# Altium PCB Pmaster-A9112-HOST_1.PcbDoc
Units mil, origin at the board's own origin, x right, y up, seen from the top; angles counter-clockwise.
Board outline 2549 x 1381 mil, 2 copper layers (Top Layer, Bottom Layer); 74 components, 57 nets, 217 pads, 353 vias.
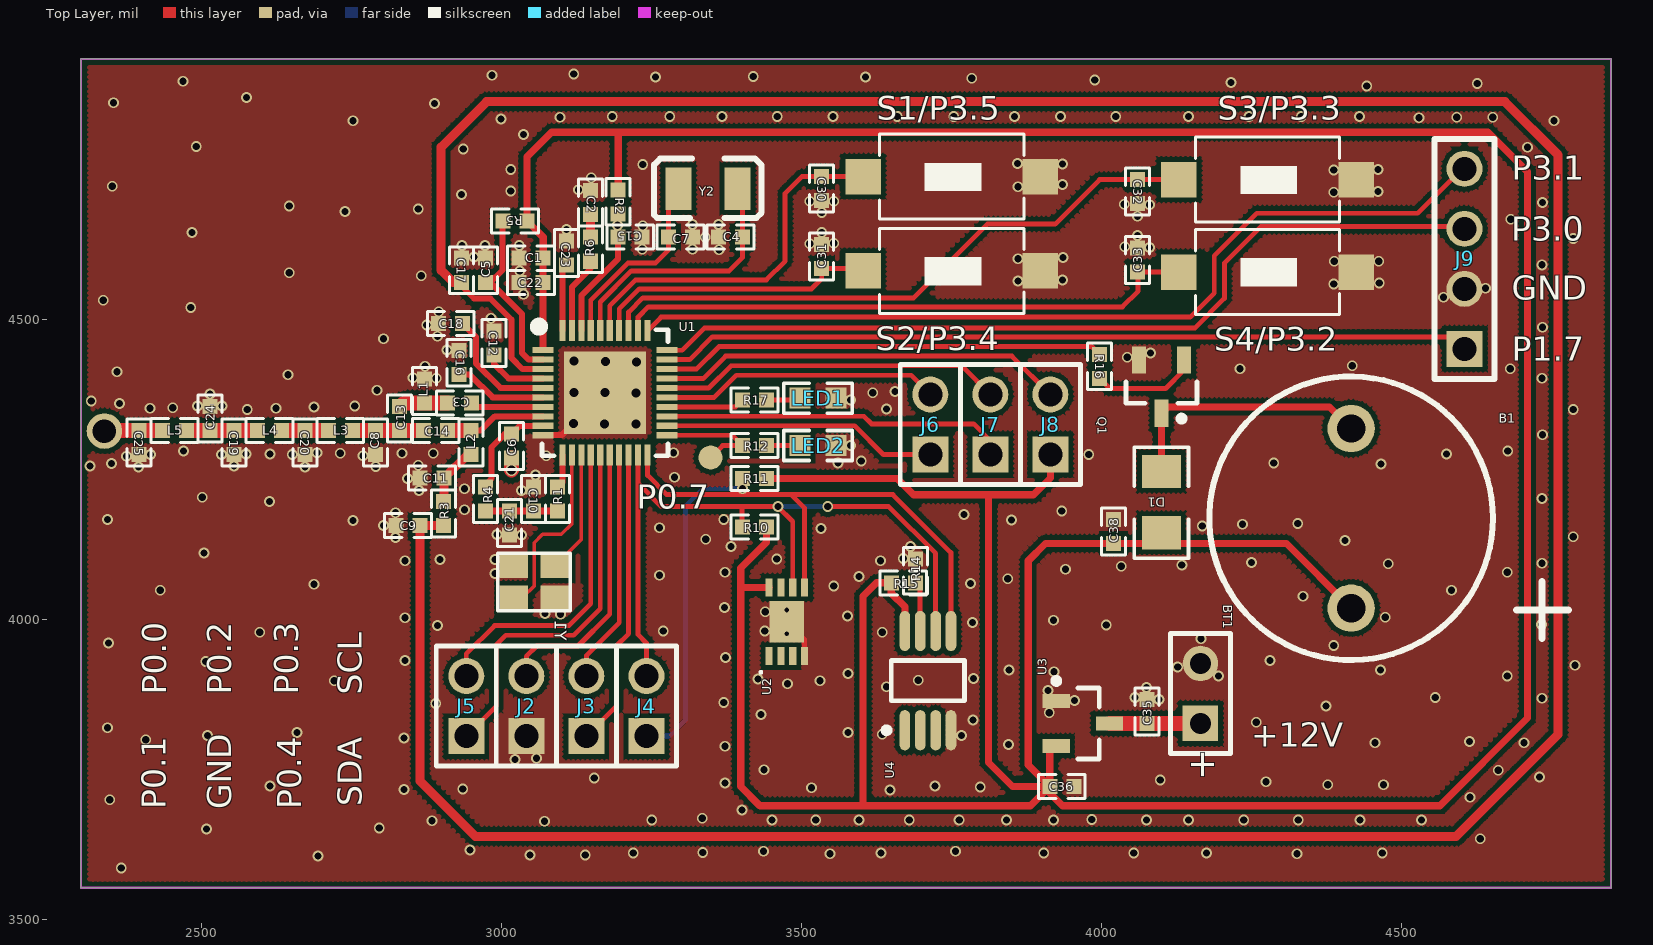
[diagram p0: Top Layer view]
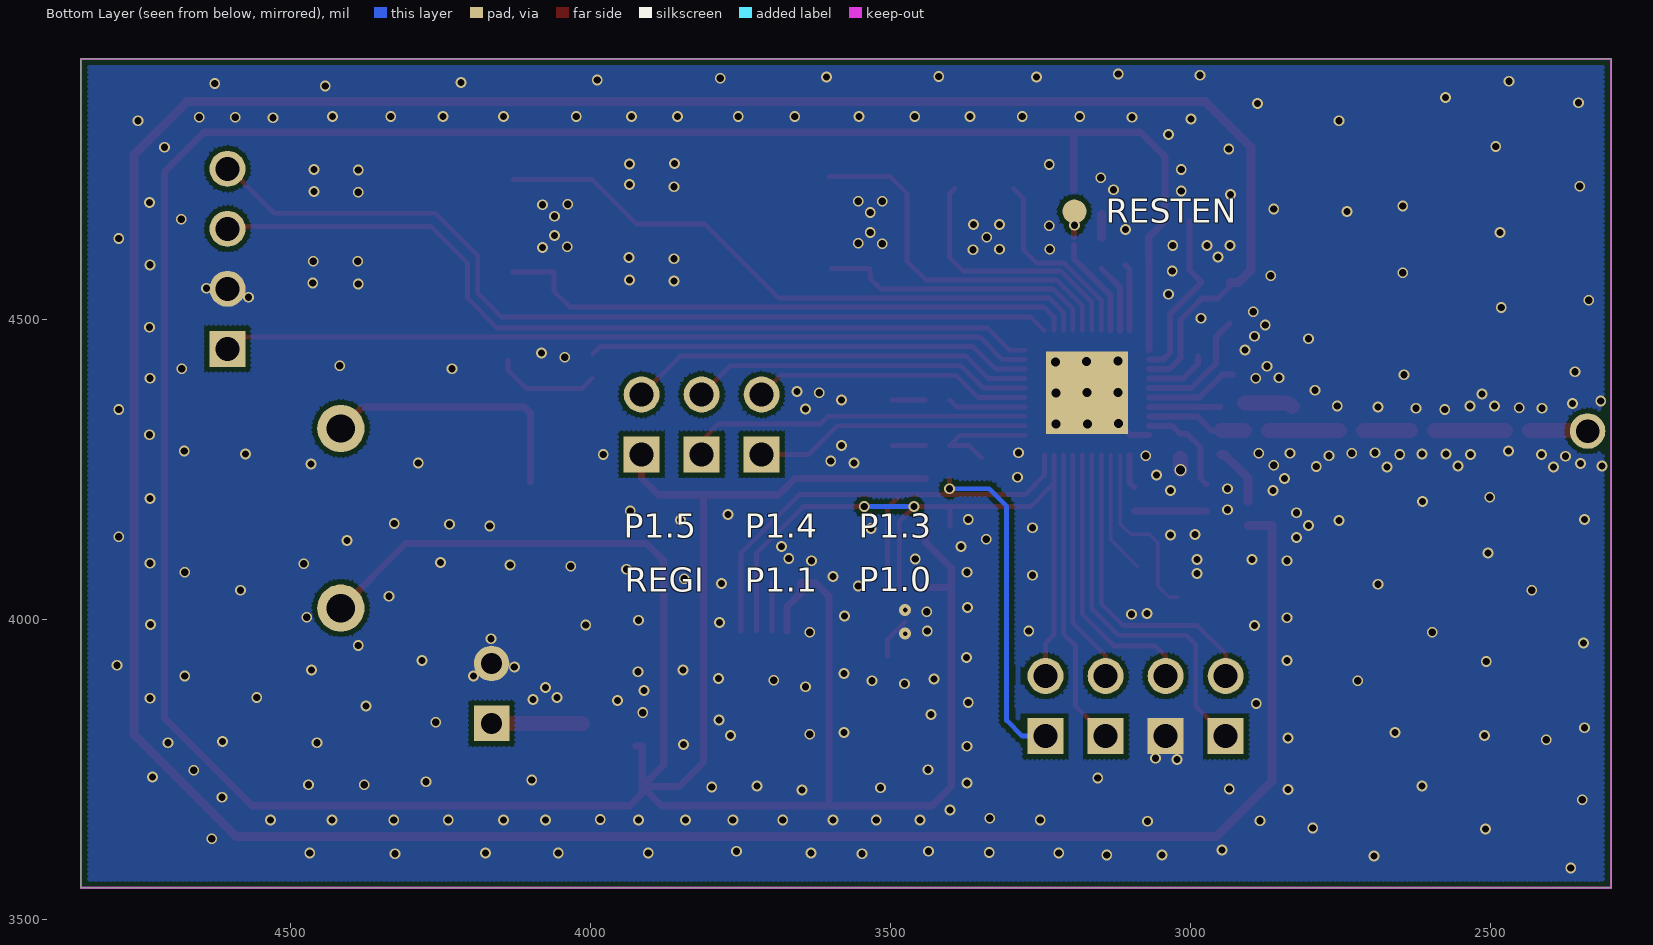
[diagram p1: Bottom Layer view, seen from below]

## Layer stack, top to bottom
Top Solder: solder mask 0.4, Solder Resist, Dk 3.5
Top Layer: signal copper 1.4
Dielectric 1: dielectric 12.6, FR-4, Dk 4.8
Bottom Layer: signal copper 1.4
Bottom Solder: solder mask 0.4, Solder Resist, Dk 3.5

## Board outline
2300,3553 2300,4934 4849,4934 4849,3553

## Design rules (kind name [scope] priority, off if disabled: settings)
Clearance [All] p1: gap=8
PlaneConnect [All] p1: planeconnectstyle=Direct reliefexpansion=20 reliefentries=4 reliefconductorwidth=10 reliefairgap=10
PolygonConnect [All] p1: connectstyle=Direct reliefconductorwidth=10 reliefentries=4 polygonreliefangle="90 Angle" airgapwidth=10
RoutingVias [All] p1: holewidth=28 width=50 viastyle="Through Hole" minholewidth=28 minwidth=50 maxholewidth=28 maxwidth=50
SolderMaskExpansion [All] p1: expansion=4
Width [All] p1: maxlimit=100 minlimit=5 preferedwidth=10
29 further rules are at their usual default settings.

## Classes and differential pairs
component class Pmaster-A9112-HOST_0: B1 BT1 C1 C2 C3 C4 C5 C6 C7 C8 C9 C10 C11 C12 C13 C14 C15 C16 C17 C18 C19 C20 C21 C22 C23 C30 C31 C32 C33 C35 C36 C38 D1 L1 L2 L3 L4 Q1 R1 R2 R3 R4 R5 R6 R10 R11 R12 R14 R15 R16 R17 SW1 SW2 SW3 SW4 TP1 U1 U3 U4 Y2

## Components (designator, comment, footprint, x,y, rotation, side; value= is the part's Value field where it differs from the comment)
B1 "BUZZER/TMB12A03" BUZEER 4416,4405 r180 top
BT1 "Battery" BAT-2 4165,3877 r90 top
C1 "10uF" A0402 3070,4602 r180 top
C2 "2.2uF" A0402 3149,4715 r270 top
C3 "100pF" A0402 2951,4361 r180 top
C4 "22pF" A0402 3402,4637 r180 top
C5 "2.2uF" A0402 2974,4562 r90 top
C6 "1uF" A0402 3017,4309 r270 top
C7 "22pF" A0402 3279,4637 r0 top
C8 "8.2pF" A0402 2791,4275 r90 top
C9 "2.2uF" A0402 2865,4157 r180 top
C10 "1nF" A0402 3054,4221 r270 top
C11 "NC" A0402 2865,4236 r0 top
C12 "1nF" A0402 2988,4441 r90 top
C13 "2.7pF" A0402 2831,4355 r270 top
C14 "27pF" A0402 2911,4315 r180 top
C15 "22nF" A0402 3195,4637 r0 top
C16 "0.1uF" A0402 2930,4448 r270 top
C17 "2.2uF" A0402 2934,4562 r90 top
C18 "470pF" A0402 2896,4493 r0 top
C19 "8.2pF" A0402 2555,4315 r270 top
C20 "15pF" A0402 2673,4315 r270 top
C21 "1uF" A0402 3014,4141 r90 top
C22 "2.2uF" A0402 3030,4562 r0 top
C23 "2.2uF" A0402 3109,4631 r270 top
C24 "NC" A0402 2515,4315 r90 top (schematic designator C19)
C25 "NC" A0402 2397,4315 r270 top (schematic designator C19)
C30 "0.1uF" A0402 3534,4698 r90 top
C31 "0.1uF" A0402 3534,4625 r270 top
C32 "0.1uF" A0402 4060,4693 r90 top
C33 "0.1uF" A0402 4060,4619 r270 top
C35 "2.2uF" A0402 4076,3867 r270 top
C36 "2.2uF" A0402 3914,3722 r0 top
C38 "0.1uF" A0402 4020,4167 r270 top
D1 "续流二极管/1N4148" 0805 4105,4247 r270 top
J2 "Comment" HDR2_2.54 3042,3806 r90 top
J3 "Comment" HDR2_2.54 3142,3806 r90 top
J4 "Comment" HDR2_2.54 3242,3806 r90 top
J5 "Comment" HDR2_2.54 2942,3806 r90 top
J6 "Comment" HDR2_2.54 3715,4275 r90 top
J7 "Comment" HDR2_2.54 3815,4275 r90 top
J8 "Comment" HDR2_2.54 3915,4275 r90 top
J9 "Comment" HDR4_2.54 4605,4451 r90 top
L1 "39nH" A0402 2872,4361 r90 top
L2 "33nH" A0402 2950,4275 r90 top
L3 "22nH" A0402 2712,4315 r0 top
L4 "22nH" A0402 2594,4315 r0 top
L5 "0" A0402 2436,4315 r0 top (schematic designator L4)
LED1 "GREEN" A0603 3498,4369 r0 top
LED2 "RED" A0603 3498,4290 r0 top
Q1 "8050_NPN" SOT23_N 4100,4388 r270 top
R1 "0" A0402 3094,4221 r270 top
R2 "100K" A0402 3195,4716 r270 top
R3 "0" A0402 2904,4157 r90 top
R4 "0" A0402 2974,4181 r90 top
R5 "0" A0402 3043,4664 r180 top
R6 "50" A0402 3149,4597 r90 top
R10 "4.7k" A0402 3442,4154.32 r180 top
R11 "4.7k" A0402 3402,4235 r0 top
R12 "330" A0402 3402,4290 r0 top
R14 "0" A0402 3690,4061.32 r90 top
R15 "NC" A0402 3650,4061.32 r0 top
R16 "1k" A0402 3997,4442 r270 top
R17 "330" A0402 3402,4366 r0 top (schematic designator R13)
S1/P3.5 "SW-PB" SW-SMD 3603,4738 r90 top
S2/P3.4 "SW-PB" SW-SMD 3603,4581 r90 top
S3/P3.3 "SW-PB" SW-SMD 4129,4733 r90 top
S4/P3.2 "SW-PB" SW-SMD 4129,4579 r90 top
U1 "A9112F4" QFN40_5*5 3173,4378 r0 top
U2 "Comment" DFN-MC8 3476,3996.32 r90 top
U3 "LP3995-33B3F" SOT-23_N 3969,3827 r0 top
U4 "EEPROM_24AA16" MSOP-MS8_N 3711,3898.32 r90 top
Y1 "12.8MHz/CL=20pF" XTAL_3.2*2.5 3055,4063 r270 top
Y2 "32.768KHz" XTAL_3215 3315,4679 r0 top

## Footprints (in the part's own frame and the unit in brackets; to place one, negate y for a bottom-side part, rotate by r counter-clockwise, add the part's x,y. Pads: shape width x height; smd on the part's side, far side on the other; paste and mask are expansions set on the pad)
0805 [mm]
  rect 1.4x1.65 smd: 1(0,-0.127) 2(2.6,-0.127)
  silkscreen extent -1.02,-1.27 3.68,1.02
A0402 [mil]
  rect 25x25 smd: 1(0,0) 2(40,0)
  silkscreen extent -19,-20 59,20, body extent -5,-15 45,15, height 39
A0603 [mil]
  rect 35x35 smd: 1(0,0) 2(60,0)
  silkscreen extent -27,-25 87,25
BAT-2 [mm] "Battery; 2 Leads"
  rect 1.5x1.5 hole 0.9: 1(-1.27,0)
  round 1.5 hole 0.9: 2(1.27,0)
  silkscreen extent -2.54,-1.27 2.54,1.27
BUZEER [mm] "TMB12A03"
  round 2 hole 1.2: 1(0,9.8) 2(0,2.2)
  silkscreen extent -6,0 6,12
DFN-MC8 [mm] "SON, 8-Leads, Body 2x3mm, Pitch 0.5mm, Microchip Recommended"
  rect 1.75x1.45 smd: 0(0,0)
  rect 0.75x0.3 smd: 1(-1.45,0.75) 2(-1.45,0.25) 3(-1.45,-0.25) 4(-1.45,-0.75) 5(1.45,-0.75) 6(1.45,-0.25) 7(1.45,0.25) 8(1.45,0.75)
  silkscreen extent -2.18,1.05 -2.09,1.15, body extent -1.55,-1.05 1.55,1.05, height 1
HDR2_2.54 [mil]
  rect 60x60 hole 40: 1(0,0)
  round 60 hole 40: 2(100,0)
  silkscreen extent -50,-50 150,50
HDR4_2.54 [mil]
  rect 60x60 hole 40: 1(0,0)
  round 60 hole 40: 2(100,0) 3(200,0) 4(300,0)
  silkscreen extent -50,-50 350,50
MSOP-MS8_N [mm] "TSOP, 8-Leads, Body 3x3mm, Pitch 0.65mm, IPC Medium Density"
  oval 1.7x0.45 smd: 1(-2.1,0.975) 2(-2.1,0.325) 3(-2.1,-0.325) 4(-2.1,-0.975) 5(2.1,-0.975) 6(2.1,-0.325) 7(2.1,0.325) 8(2.1,0.975)
  silkscreen extent -2.22,-1.55 0.85,1.87, body extent -1.6,-1.6 1.6,1.6, height 1.1
QFN40_5*5 [mil]
  rect 35x10.24 smd: 1(-103.43,70.87) 2(-103.43,55.12) 3(-103.43,39.37) 4(-103.43,23.62) 5(-103.43,7.87) 6(-103.43,-7.87) 7(-103.43,-23.62) 8(-103.43,-39.37) 9(-103.43,-55.12) 10(-103.43,-70.87) 21(103.43,-70.87) 22(103.43,-55.12) 23(103.43,-39.37) 24(103.43,-23.62) 25(103.43,-7.87) 26(103.43,7.87) 27(103.43,23.62) 28(103.43,39.37) 29(103.43,55.12) 30(103.43,70.87)
  rect 10.24x35 smd: 11(-70.87,-103.43) 12(-55.12,-103.43) 13(-39.37,-103.43) 14(-23.62,-103.43) 15(-7.87,-103.43) 16(7.87,-103.43) 17(23.62,-103.43) 18(39.37,-103.43) 19(55.12,-103.43) 20(70.87,-103.43) 31(70.87,103.43) 32(55.12,103.43) 33(39.37,103.43) 34(23.62,103.43) 35(7.87,103.43) 36(-7.87,103.43) 37(-23.62,103.43) 38(-39.37,103.43) 39(-55.12,103.43) 40(-70.87,103.43)
  round 15 hole 15: ""(-52.5,-51.5) ""(-52,0.5) ""(-51.5,52.5) ""(-0.5,-52) ""(0.5,52) ""(51.5,-52.5) ""(52,-0.5) ""(52.5,51.5)
  rect 136.79x136.79 hole 15: ""(0,0)
  silkscreen extent -115,-105 105,115
SOT23_N [mm] "SOT23, 3-Leads, Body 2.9x1.3mm, Pitch 0.95mm, Lead Span 2.3mm - Reverse Pinning, IPC Medium Density"
  rect 1.15x0.6 smd: 1(1.125,0) 2(-1.125,-0.95) 3(-1.125,0.95)
  silkscreen extent -0.2,-1.5 1.47,1.5, body extent -0.7,-1.5 0.7,1.5, height 1.1
SOT-23_N [mm] "SOT23, 3-Leads, Body 2.9x1.3mm, Pitch 0.95mm, Lead Span 2.5mm, IPC Medium Density"
  rect 1.15x0.6 smd: 1(-1.125,0.95) 2(-1.125,-0.95) 3(1.125,0)
  silkscreen extent -1.25,-1.5 0.7,1.92, body extent -0.7,-1.5 0.7,1.5, height 1.1
SW-SMD [mm]
  rect 1.5x1.5 smd: 1(0,0) 2(0,-7.5)
  silkscreen extent -1.8,-6.8 1.8,-0.7
XTAL_3.2*2.5 [mm]
  rect 1x1.2 smd: 1(-0.66,0.87) 2(-0.66,-0.87) 3(0.66,-0.87) 4(0.65,0.87)
  silkscreen extent -1.21,-1.55 1.22,1.53
XTAL_3215 [mm] "32.768kHz"
  rect 1.1x1.8 smd: 0(-0.5,0.991) 1(2,0.991)
  silkscreen extent -1.52,-0.25 3.02,2.26

## Part data
B1: library part BUZZER
BT1: "Multicell Battery"
C1 C2 C3 C5 C6 C8 C10 C12 C13 C14 C16 C18 C21 C22 C23 C30 C31 C32 C33 C35: library part CAP
C4 C7: library part C/0402, "Chip C"
C9 C11 C17 C19 C20 C24 C25 C36 C38: library part C/0603, "Chip C"
C15: library part C/1206, "Chip C"
D1: library part Diode, "Default Diode"
L1 L2: library part L/0402, "Chip L"
L3 L4 L5 R6: library part L/0603
Q1: library part NPN, "NPN Bipolar Transistor"
R1 R5 R10 R11 R12 R14 R15 R16 R17: library part RES1
R2: library part R/0402, "Chip R"
R3 R4: library part R/0603, "Chip  R"
U3: library part REG\G903\3.3V\SOT-223, "GMT 3.3V REGULTOR"
Y2: library part CRYSTAL, "Crystal"

## Free pads (board coordinates)
  round 59.06 hole 39.37: 0(2339,4314)
  round 40 smd far side: 0(3194,4680)
  round 40 smd: 1(3349,4270)

## Via types
v1: diameter 18, hole 12, Top Layer to Bottom Layer, tented both sides, 350 vias
v2: diameter 19.68, hole 7.87, Top Layer to Bottom Layer, tented top, 2 vias
v3: diameter 20, hole 15, Top Layer to Bottom Layer, tented both sides, 1 vias

## Nets (pads, with @x,y where several pads share a name; then routed paths per layer and width w, separated by ;. In a path a pad name is that pad's centre, name@x,y a point inside that pad or via, vN(x,y) a via of type N, cw(c..) or ccw(c..) an arc to the next point about the centre after c; other vN are vias at no path point)
1: C25.1 L5.1 pad.0@2339,4314 | length 97
  Top Layer w25: pad.0@2339,4314 pad.0@2340,4314 ; pad.0@2340,4315 C25.1 L5.1
2: 
3: 
+12V: BT1.1 C35.2 U3.3 | length 151.7
  Top Layer w25: U3.3 BT1.1
BG: C12.1 U1.4 | length 103.7
  Top Layer w10: C12.1@2988,4438 2988,4426 3012.38,4401.62 U1.4
GND: BT1.2 C1.2 C2.1 C4.2 C5.2 C6.2 C7.2 C8.1 C9.2 C10.1 C11.1 C12.2 C15.2 C16.1 C17.2 C18.1 C19.2 C20.2 C21.1 C22.1 C23.1 C24.2 C25.2 C30.1 C31.1 C32.1 C33.1 C35.1 C36.2 C38.1 J2.1 J9.2 L1.2 LED1.2 LED2.2 Q1.2 R14.2 S1/P3.5.2 S2/P3.4.2 S3/P3.3.2 S4/P3.2.2 U1. U1.10 U2.0 U2.4 U3.1 U4.4 Y1.2 Y1.4 | length 148.3
  Top Layer w8: U2.0 3505.53,3966.79 U2.4
  Top Layer w10: U1.10 3101.13,4307.13 U1.@3120.5,4326.5
  Top Layer w25: v3(3017,4249) C6.2
  other v1: 2367,3586 2695,3606 3048,3608 3140,3608 3548,3610 4326,3610 3220,3611 3633,3611 3904,3611 4054,3611 4175,3611 4468,3611 3336,3612 3437,3614 3757,3614 2948,3616 4631,3635 2509,3651 2797,3653 3072,3664 2885,3665 3251,3666 3451,3666 3524,3666 3596,3666 3680,3666 3763,3666 3842,3666 3920,3666 4075,3666 4145,3666 4237,3666 4328,3666 4431,3666 4533,3666 3984,3667 3335,3669 3401,3683 2348,3700 4614,3704 3648,3716 2838,3717 2936,3718 3517,3720 3798,3721 2615,3723 3723,3723 4377,3725 4470,3725 3373,3728 4274,3730 4098,3733 3155,3736 4730,3738 4661,3749 3438,3750 3023,3767 3059,3769 3373,3789 3845,3792 4456,3795 4704,3795 4613,3797 2408,3800 2838,3803 2511,3807 3767,3807 3635,3809 2660,3812 3578,3812 2344,3820 4258,3829 3786,3833 3433,3842 3913,3845 4374,3856 2891,3860 3371,3862 3955,3865 4096,3867 4734,3869 4056,3870 4556,3870 3911,3882 4075,3887 3642,3888 3477,3893 2722,3898 3531,3898 3695,3899 3428,3901 3787,3902 4195,3906 4676,3906 3578,3910 3921,3913 3846,3916 4465,3916 4127,3921 4789,3924 2508,3930 2840,3932 4281,3932 3374,3937 4387,3957 2346,3961 4166,3968 2598,3979 3635,3979 3270,3981 3439,3981 2894,3990 4008,3991 4733,3992 3785,3995 3920,3999 2840,4003 4473,4004 3577,4006 3099,4009 3073,4010 3440,4013 3372,4020 4336,4039 2432,4049 4583,4049 3554,4056 2688,4059 3782,4060 3844,4068 3596,4072 3264,4074 2990,4077 3373,4079 4676,4079 3940,4084 4033,4089 4134,4091 4478,4093 4734,4094 4250,4095 2840,4098 3632,4098 2898,4100 2990,4100 3459,4101 3670,4102 2505,4111 3383,4122 3682,4122 4406,4132 3341,4134 2824,4137 4786,4138 3034,4141 2993,4142 3533,4152 3264,4153 4168,4156 2804,4157 4235,4159 4327,4160 2753,4165 3850,4166 2344,4167 3371,4167 3771,4175 2824,4178 3934,4181 2939,4183 2614,4197 4734,4202 2502,4204 2863,4215 3034,4215 2939,4218 2844,4235 3289,4237 3057,4241 2396,4254 2673,4254 2791,4255 2315,4256 2555,4256 2862,4257 4466,4259 2351,4260 3561,4261 4287,4261 3600,4264 2376,4272 2770,4273 3075,4273 2416,4275 2534,4275 2652,4275 3979,4275 2575,4276 2615,4276 4575,4276 2732,4277 2835,4277 2887,4277 2693,4278 3287,4278 2471,4281 4677,4281 3582,4290 4735,4308 2577,4350 4786,4350 3642,4351 2415,4352 2625,4352 2453,4353 2688,4354 2494,4356 2535,4356 2756,4356 2364,4360 2317,4364 3582,4366 2515,4376 3619,4378 3656,4380 2793,4382 2892,4402 4734,4402 2853,4403 2645,4408 2360,4413 4231,4418 4681,4418 2873,4422 4418,4423 4043,4437 4082,4444 2910,4449 2804,4468 2894,4472 4735,4487 2876,4491 2983,4502 2896,4513 2483,4520 2337,4532 4570,4537 3037,4542 4640,4552 4387,4559 4463,4561 3861,4564 3935,4566 2867,4573 2647,4578 3031,4581 4734,4591 4388,4597 4462,4597 3861,4601 3936,4603 2955,4604 3363,4616 3235,4617 3319,4617 4080,4620 4039,4621 2935,4623 2973,4623 3030,4623 3514,4626 3554,4627 4786,4635 3340,4637 4060,4640 2485,4645 3534,4645 3109,4650 3236,4656 3319,4658 3362,4658 4682,4667 4060,4672 3534,4678 2740,4680 2862,4684 2647,4689 4080,4691 4038,4692 4735,4695 3514,4697 3554,4697 2934,4708 4387,4712 4461,4713 3016,4714 3129,4716 3861,4721 2352,4722 3935,4725 3150,4736 4387,4749 3016,4750 4461,4750 3236,4758 3935,4759 3860,4760 2937,4784 4710,4787 2492,4788 3037,4808 2753,4831 4754,4831 3000,4834 4529,4836 3098,4837 4592,4837 4652,4837 3185,4838 3281,4838 3368,4838 3460,4838 3553,4838 3660,4838 3754,4838 3855,4838 3932,4838 4024,4838 4145,4838 4246,4838 4333,4838 4430,4838 2889,4860 2354,4861 2576,4870 4442,4889 4626,4893 4216,4895 2470,4897 3989,4899 3784,4902 3257,4904 3607,4904 3420,4905 2985,4907 3121,4909
  other v2: 3476,3976.63 3476,4016
NetB1_2: B1.2 D1.1 Q1.1 | length 450
  Top Layer w12: D1.1@4100,4229 Q1.1 4110.68,4354.39 4380,4354.39 B1.2
NetC2_2: C2.2 R6.2 | length 38
  Top Layer w15: R6.2 C2.2
NetC3_2: C3.2 C13.1 L1.1 | length 81.6
  Top Layer w25: C13.1 cw(c2845.49,4340.51) 2845.49,4361 L1.1 C3.2
NetC8_2: C8.2 C13.2 C14.2 L3.2 | length 119
  Top Layer w25: L3.2 C14.2
NetC11_2: C11.2 L2.1 R3.2 | length 99.2
  Top Layer w15: R3.2@2905,4198 C11.2 2944,4275 L2.1
NetC19_1: C19.1 C24.1 L4.1 L5.2 | length 118
  Top Layer w25: L5.2 C24.1 C19.1 L4.1
NetC20_1: C20.1 L3.1 L4.2 | length 78
  Top Layer w25: L4.2 C20.1 L3.1
NetC23_2: C23.2 U1.40 | length 106.4
  Top Layer w10: U1.40 3102.13,4578.13 ; C23.2@3102.13,4584.13 C23.2
NetLED_1_1: LED2.1 R12.2 | length 56
  Top Layer w8: R12.2 LED2.1
NetLED_1_3: LED1.1 R17.2 | length 56
  Top Layer w8: R17.2 LED1.1@3498,4366
NetQ1_2: Q1.3 R16.2 | length 176.9
  Top Layer w8: R16.2 4014,4385 4107,4385 4137.4,4415.4 Q1.3
NetR14_1: R14.1 R15.2 U4.7 | length 80.1
  Top Layer w8: U4.7@3698,3981.2 R14.1@3698,4061.32
P0.0: J5.2 U1.14 | length 527.1
  Top Layer w8: J5.2 2942,3943 2989,3990 3113,3990 3149.38,4026.38 U1.14
P0.1: J5.1 U1.15 | length 627.2
  Top Layer w8: J5.1 2992,3856 2992,3958 3008,3974 3121,3974 3165.13,4018.13 U1.15
P0.2: J2.2 U1.16 | length 466.5
  Top Layer w8: J2.2 3042,3939 3059,3956 3128,3956 3180.87,4008.87 U1.16
P0.3: J3.2 U1.17 | length 391.2
  Top Layer w8: J3.2 3142,3940 3196.62,3994.62 U1.17
P0.4/DEBUG_EN: J3.1 U1.18 | length 497.7
  Top Layer w8: J3.1 3192,3856 3192,3956 3212.37,3976.37 U1.18
P0.7/GIO1: pad.1 R12.1 U1.21 | length 194
  Top Layer w8: U1.21 3384.87,4307.13 R12.1 3369,4290 pad.1
P1.0: J6.1 U1.22 | length 458.4
  Top Layer w8: U1.22 3589.12,4322.88 3637,4275 J6.1
P1.1: J7.1 U1.23 | length 578.4
  Top Layer w8: U1.23 3604.37,4338.63 3617,4326 3787,4326 3815,4298 J7.1
P1.2/GIO2: R17.1 U1.24 | length 130.4
  Top Layer w8: U1.24 3390.38,4354.38 R17.1
P1.3/CKO: J6.2 U1.25 | length 467.1
  Top Layer w8: U1.25 3355.13,4370.13 3392,4407 3683,4407 J6.2
P1.4/TTDIO: J7.2 U1.26 | length 573.8
  Top Layer w8: U1.26 3345.87,4385.87 3383,4423 3767,4423 J7.2
P1.5/TTCLK: J8.2 U1.27 | length 680.6
  Top Layer w8: U1.27 3336.62,4401.62 3374,4439 3851,4439 J8.2
P1.6: R16.1 U1.28 | length 741.5
  Top Layer w8: U1.28 3325.37,4417.37 3363,4455 3984,4455 R16.1
P1.7: J9.1 U1.29 | length 1350.9
  Top Layer w8: U1.29 3314.12,4433.12 3352,4471 4589,4471 J9.1@4605,4455
P3.0: J9.3 U1.30 | length 1448.5
  Top Layer w8: U1.30 3301.87,4448.87 3339,4486 4156,4486 4205,4535 4205,4594 4266,4655 J9.3@4605,4655
P3.1: J9.4 U1.31 | length 1510.8
  Top Layer w8: U1.31 3266.44,4504 4148,4504 4188,4544 4188,4606 4259,4677 4527,4677 J9.4@4605,4755
P3.2: C33.2 S4/P3.2.1 U1.32 | length 973.3
  Top Layer w8: U1.32 3228.12,4504.12 3245,4521 4035,4521 4061,4547 4061,4579 S4/P3.2.1
P3.3: C32.2 S3/P3.3.1 U1.33 | length 1039
  Top Layer w8: U1.33 3212.37,4512.37 3236,4536 3687,4536 3810,4659 3923,4659 3997,4733 C32.2 S3/P3.3.1
P3.4: C31.2 S2/P3.4.1 U1.34 | length 470.4
  Top Layer w8: U1.34 3196.62,4517.62 3230,4551 3517,4551 3534,4568 C31.2@3534,4579 ; C31.2 S2/P3.4.1@3599,4585
P3.5: C30.2 S1/P3.5.1 U1.35 | length 618.9
  Top Layer w8: U1.35 3180.87,4522.87 3224,4566 3442,4566 3473,4597 3473,4710 3501,4738 C30.2 S1/P3.5.1
REGI: B1.1 C1.1 C22.2 C36.1 C38.2 D1.2 J8.1 R2.1 R5.1 R10.1 R11.2 R15.1 U1.1 U2.8 U3.2 U4.8 | length 7620.4
  Top Layer w10: C1.1@3070,4601.57 C1.1
  Top Layer w12: U1.1@3069.57,4450 C1.1@3069.57,4601.57 ; C1.1 3070,4637 R5.1 3043,4771 3084,4812 3195,4812 ; R2.1 3195,4812 ; 3399,4053.4 U2.8 ; R10.1 3442,4129 3399,4086 3399,3722 3431,3690 3882,3690 C36.1 ; R11.2 3660,4235 3687,4208 3887,4208 3915,4236 J8.1 ; 3603,3691 3603,4039 3625.32,4061.32 R15.1 3650,4044 3672.61,4021.39 U4.8 ; 3812,4207 3812,3762 3852,3722 C36.1 ; U3.2 3914,3789.6 C36.1 ; D1.2@4094.64,4127 C38.2 3907,4127 3878,4098 3878,3758 C36.1 ; D1.2@4095,4126.64 4308.36,4126.64 B1.1@4415.91,4019.09 ; 3195,4812 4644,4812 4710,4746 4710,3836 4564,3690 3935,3690 3914,3711 C36.1
RESETN: C15.1 pad.0@3194,4680 R2.2 U1.38 | length 230
  Top Layer w10: U1.38 3133.63,4539.63 3195,4601 3195,4624 ; C15.1 R2.2
  Bottom Layer w10: v1(3194,4657) pad.0@3194,4680
RFI: C3.1 U1.7 | length 118
  Top Layer w10: C3.1@2951.62,4354.38 U1.7
RFO: C14.1 L2.2 U1.8 | length 168.4
  Top Layer w10: L2.2 2966,4315 2989.63,4338.63 U1.8
  Top Layer w25: C14.1 L2.2
RSSI: C18.2 U1.5 | length 203.7
  Top Layer w10: C18.2 2958,4471 2958,4427 2999.13,4385.87 U1.5
RTCI: C4.1 U1.36 Y2.1 | length 433.6
  Top Layer w8: U1.36 3165.13,4529.13 3217,4581 3380,4581 3402,4603 C4.1 3402,4709.76 Y2.1
RTCO: C7.1 U1.37 Y2.0 | length 324
  Top Layer w8: U1.37 3149.38,4532.38 3211,4594 3257,4594 3279,4616 C7.1 3279,4701.69 Y2.0
SCL: J4.2 R10.2 U1.19 U2.6 U4.6 | length 1225.8
  Top Layer w8: U1.19 3228.12,4227 ; J4.2 3242,3961 3228.12,3974.88 3228.12,4227 ; R10.2@3401,4155.32 3401,4188.32 ; U2.6 3485.84,4163.47 v1(3461,4188.32) 3401,4188.32 ; v1(3544,4188.32) 3645.68,4188.32 3723.8,4110.2 U4.6 ; 3228.12,4227 3266.8,4188.32 3401,4188.32
  Bottom Layer w8: v1(3461,4188.32) v1(3544,4188.32)
SDA: J4.1 R11.1 U1.20 U2.5 U4.5 | length 1452.5
  Top Layer w8: U1.20 3243.87,4240.13 3275.68,4208.32 3483,4208.32 ; v1@3402,4210.32 R11.1 ; U2.5 3505.53,4185.79 3483,4208.32 ; U4.5 3749.39,4111.61 3652.68,4208.32 3483,4208.32
  Bottom Layer w8: J4.1 3281,3806 3307,3832 3307,4189 3336,4218 v1(3402,4218)
VCO_GND: 
VDD_A: C16.2 U1.6 | length 155.3
  Top Layer w10: C16.2 2948,4408 2985.87,4370.13 U1.6
VDD_D: R6.1 U1.39 | length 116.5
  Top Layer w10: U1.39 3117.88,4553.88 R6.1@3149,4585
VDD_P: R1.1 U1.11 | length 56.5
  Top Layer w10: R1.1@3095,4221 3102.13,4228.13 U1.11
VDD_V: C6.1 R4.2 U1.9 | length 166.6
  Top Layer w10: R4.2@2974,4225 2984,4235 2984,4287 3006,4309 C6.1 3030.88,4322.88 U1.9
VDDP: C10.2 C21.2 R1.2 R4.1 | length 120
  Top Layer w12: R4.1 C21.2 R1.2
VPAI: C5.1 R5.2 U1.2 | length 289.5
  Top Layer w10: R5.2@3002.5,4664 3002.5,4582.5 2982,4562 3035,4509 3035,4444 3045.88,4433.12 U1.2
VPAO: C9.1 C17.1 R3.1 U1.3 | length 5847.8
  Top Layer w10: C17.1 2934,4555.79 2954.79,4535 2982,4535 3017,4500 3017,4436 3035.63,4417.37 U1.3
  Top Layer w15: R3.1 C9.1 2865,3731 2957,3639 4591,3639 4761,3809 4761,4774 4672,4863 2976,4863 2900,4787 2900,4582 2920,4562 C17.1
XI: U1.13 Y1.1 | length 204
  Top Layer w6: Y1.1 3133.63,4133.36 U1.13
XO: U1.12 Y1.3 | length 304.9
  Top Layer w6: Y1.3 3036.02,4037.02 3055,4056 3055,4128 3069,4142 3100,4142 3117.88,4159.88 U1.12
pads on no net: U2.1 U2.2 U2.3 U2.7 U4.1 U4.2 U4.3

## Polygon pours and split planes (outlines as drawn)
GND on Top Layer "TopLayer-No Net" (hatched 90Degree grid 8 track 8, remove dead copper, pour order 4): 2299,4934 2299,3553 4849,3553 4849,4934
GND on Bottom Layer "TopLayer-No Net" (hatched 90Degree grid 8 track 8, remove dead copper, pour order 3): 2299,4934 2299,3553 4849,3553 4849,4934

## Keep-outs
Keep-Out Layer:
  the board outline again, w3.94

## Other copper
Top Layer:
  pour cut-out: 3045,4252.12 cw(c3016,4252.12) 3016,4223.12 cw(c3016,4250.12) 2989,4250.12 2989,4284.12 cw(c3017.94,4284.12) 3017.94,4313.06 cw(c3017.94,4286) 3045,4286

## Silkscreen, mask and mechanical layers (free items; w line width, h text height)
Top Overlay:
  lines w12: 4692,4016 4778,4016 ; 4734,3969 4734,4063
  text "P3.1" at 4684,4733 h40
  text "P3.0" at 4683,4631 h40
  text "GND" at 4684,4533 h40
  text "P1.7" at 4684,4431 h40
  text "P0.7" at 3226,4185 h40
  text "P0.0" at 2442,3875 h40 r90
  text "P0.2" at 2550,3875 h40 r90
  text "P0.3" at 2662,3875 h40 r90
  text "SCL" at 2768,3875 h40 r90
  text "+12V" at 4250,3788 h40
  text "SDA" at 2768,3689 h40 r90
  text "P0.1" at 2441,3684 h40 r90
  text "GND" at 2550,3684 h40 r90
  text "P0.4" at 2667,3684 h40 r90
Bottom Overlay:
  text "RESTEN" at 3142,4661 h40
  text "P1.3" at 3553,4136 h40
  text "P1.4" at 3743,4136 h40
  text "P1.5" at 3945,4136 h40
  text "P1.0" at 3553,4047 h40
  text "P1.1" at 3743,4046 h40
  text "REGI" at 3943,4046 h40
Bottom Solder:
  rectangle: 2300,4372 2451,4424
  rectangle: 2396,4231 2451,4422
  rectangle: 2300,4210 2451,4259

## Dimensions
5087,4947 to 4933,3566 on Top Overlay
2305,3486 to 4838,3462 on Top Overlay

## Text inside footprints (layer, text, board x,y; h text height)
BT1: Top Overlay "+" at 4187.72,3732.51 h45.28 r90